# Altium PCB PT-MIS-PCB-007_v1 PCB.PcbDoc
Units mm, origin at the board's own origin, x right, y up, seen from the top; angles counter-clockwise.
Board outline 83 x 100 mm, 2 copper layers (Top Layer, Bottom Layer), stack 1.58 mm thick; 10 components, 5 nets, 37 pads, 42 vias.
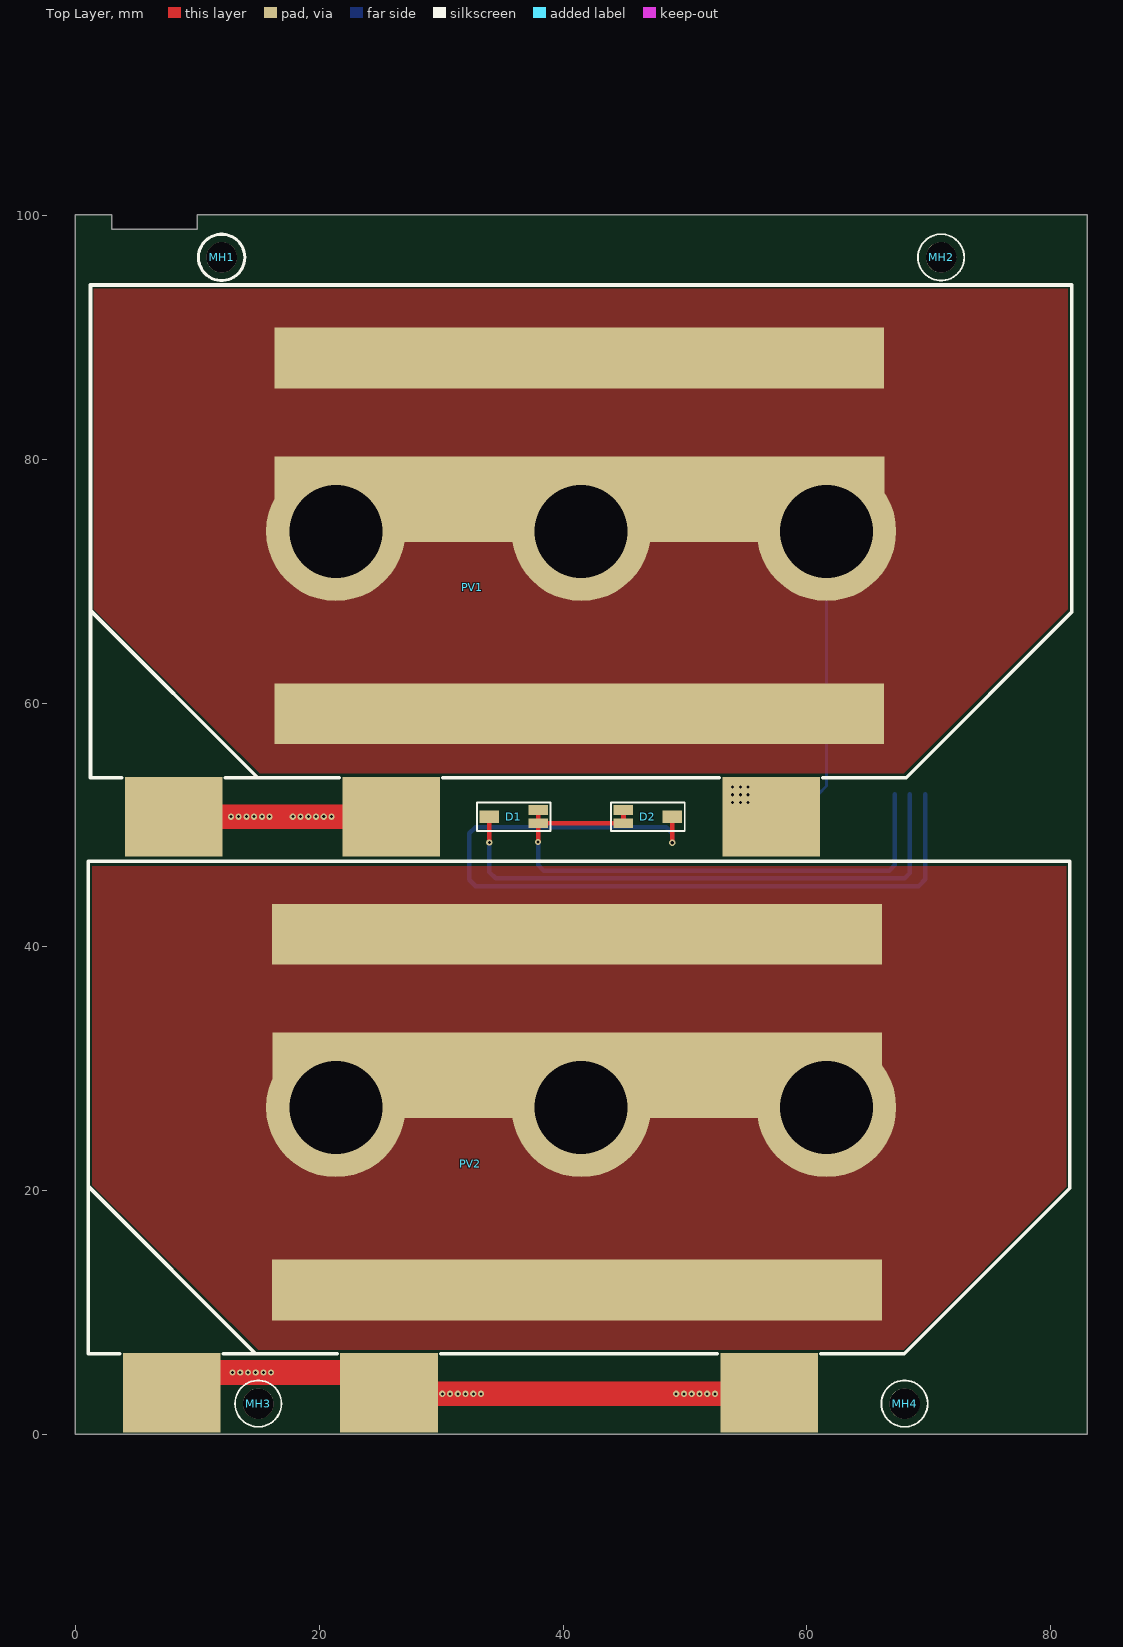
[diagram p0: Top Layer view]
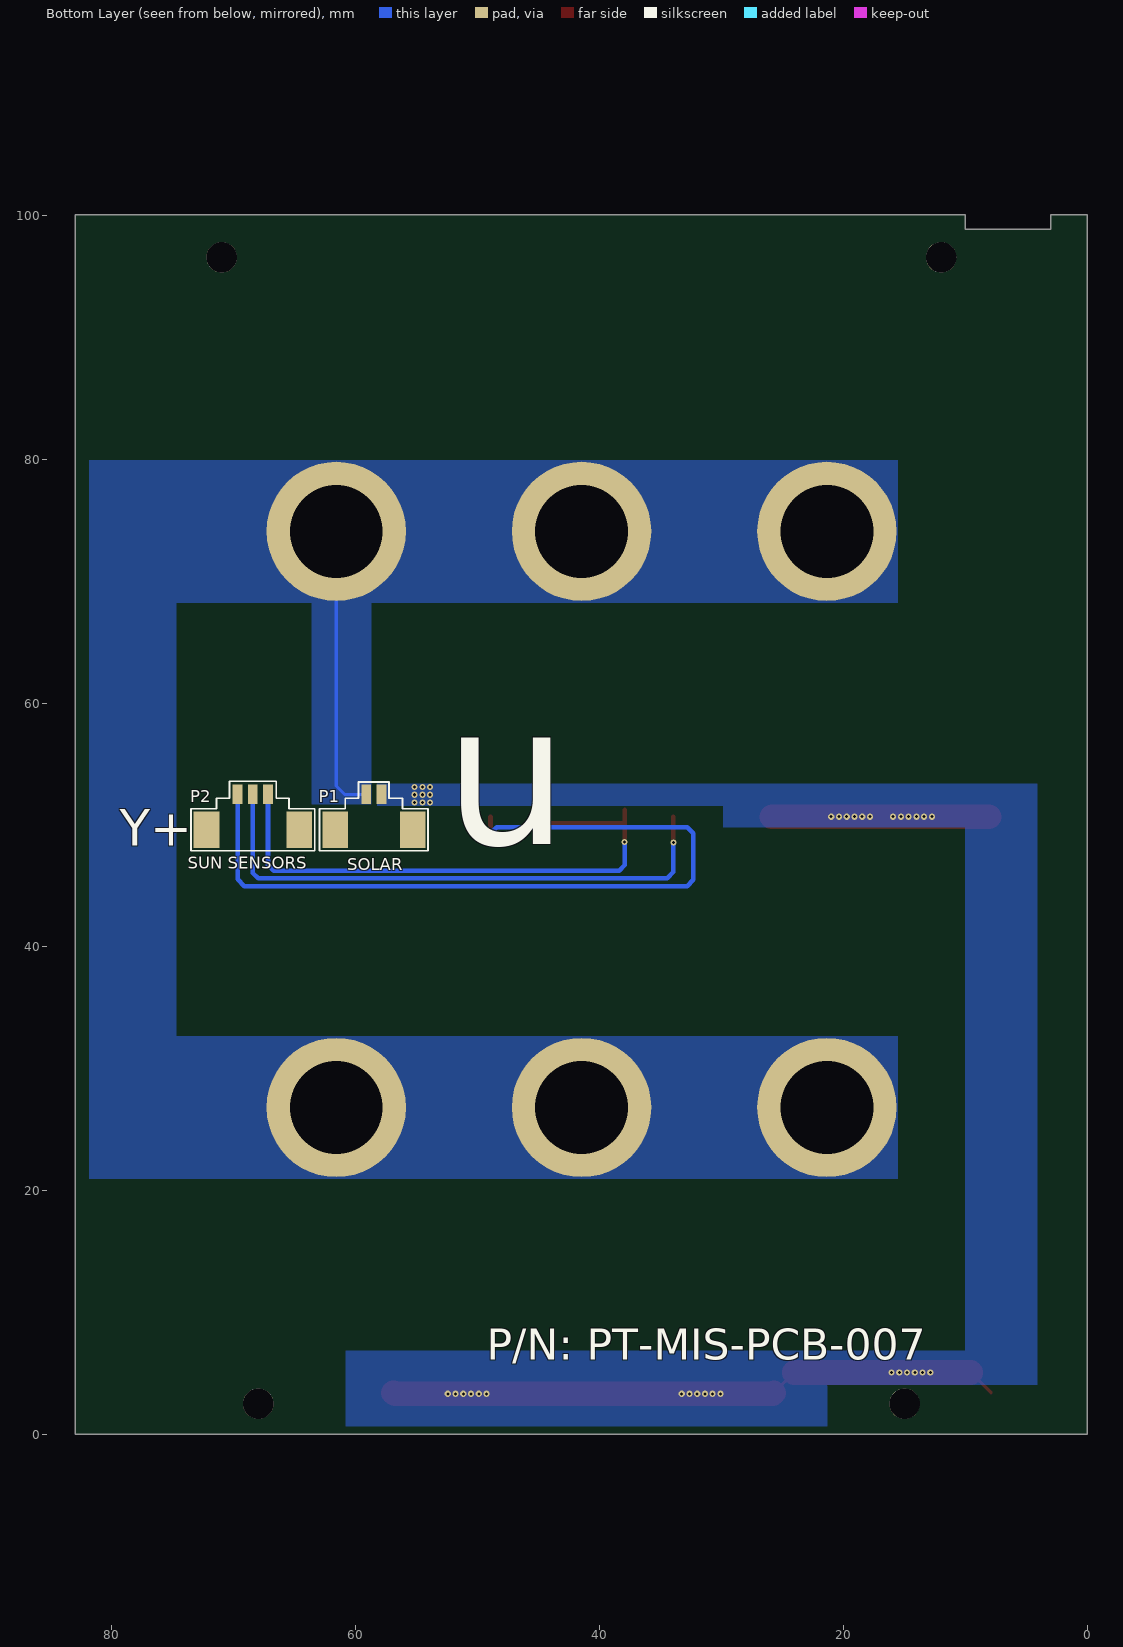
[diagram p1: Bottom Layer view, seen from below]
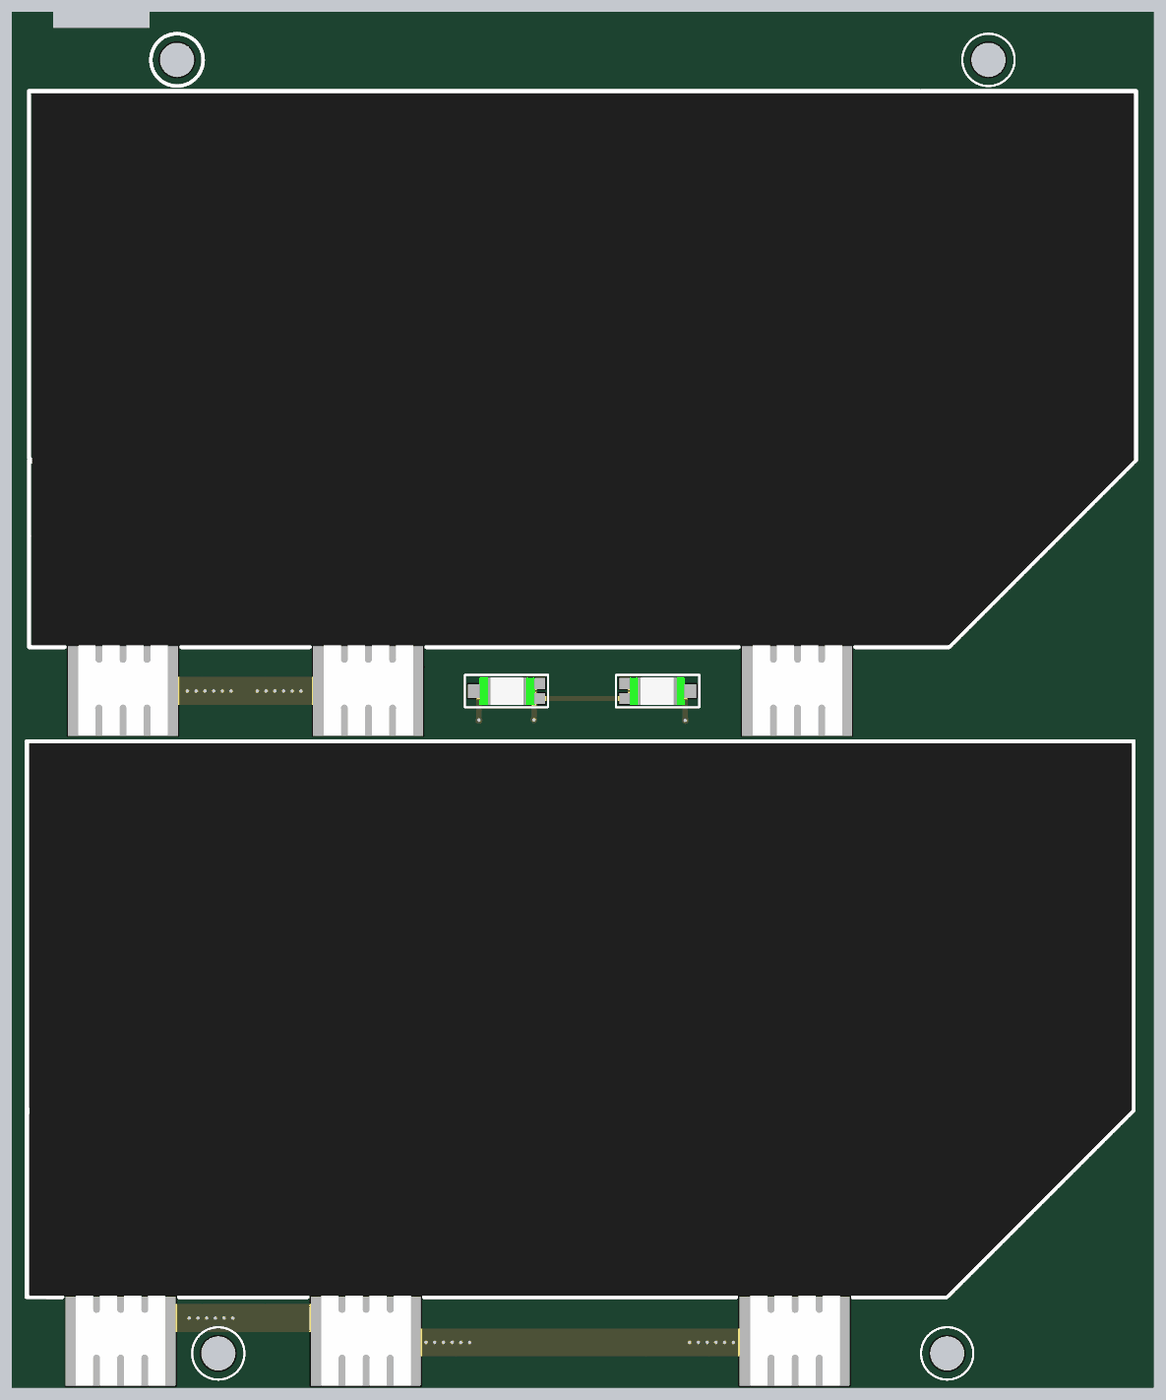
[diagram p2: 3D render of the assembled board from above, using the file's embedded part models]

## Layer stack, top to bottom
Top Solder: solder mask 0.0102, Solder Resist, Dk 3.5
Top Layer: signal copper 0.0356
Dielectric 1: dielectric 1.5086, FR-4, Dk 4.8
Bottom Layer: signal copper 0.0356
Bottom Solder: solder mask 0.0102, Solder Resist, Dk 3.5

## Board outline
0,0.051 0,100.051 3,100.051 3,98.851 10,98.851 10,100.051 83,100.051 83,0.051

## Design rules (kind name [scope] priority, off if disabled: settings)
Clearance [All] p1: gap=0.254 ignorepadtopadclearanceinfootprint=FALSE except(0: Arc-Hole Track-Hole SMDPad-Hole THPad-Hole Via-Hole Fill-Hole Poly-Hole Region-Hole Text-Hole)
PolygonConnect [All] p1: connectstyle=Direct reliefconductorwidth=0.254 reliefentries=4 polygonreliefangle="90 Angle" airgapwidth=0.254
RoutingVias [All] p1: holewidth=0.711 width=1.27 viastyle="Through Hole" minholewidth=0.711 minwidth=1.27 maxholewidth=0.711 maxwidth=1.27
SolderMaskExpansion [All] p1: expansion=0.102
Width [All] p1: maxlimit=2.54 minlimit=0.254 preferedwidth=0.254
30 further rules are at their usual default settings.

## Classes and differential pairs
component class "[03] - SCHEMATIC": D1 D2 MH1 MH2 MH3 MH4 P1 P2 PV1

## Components (designator, comment, footprint, x,y, rotation, side; value= is the part's Value field where it differs from the comment)
D1 "TEMD6010FX01" TEMD6010FX01 35.928,50.686 r180 top
D2 "TEMD6010FX01" TEMD6010FX01 46.977,50.686 r0 top
MH1 "MH_3.8MMNC_2.5MMD" MH_3.8MMNC_2MMD_NON_COPPER_NPTH 12,96.551 r0 top
MH2 "MH_3.8MMNC_2.5MMD" MH_3.8MMNC_2MMD_NON_COPPER_NPTH 71,96.551 r0 top
MH3 "MH_3.8MMNC_2.5MMD" MH_3.8MMNC_2MMD_NON_COPPER_NPTH 15,2.551 r0 top
MH4 "MH_3.8MMNC_2.5MMD" MH_3.8MMNC_2MMD_NON_COPPER_NPTH 68,2.551 r0 top
P1 "0533980271" 0533980271 58.518,51.067 r180 bottom
P2 "0533980371" 0533980371 68.443,51.067 r180 bottom
PV1 "AZUR SPACE 3G30A" "AZUR SPACE 3G30A" 41.343,76.729 r180 top
PV2 "AZUR SPACE 3G30A" "AZUR SPACE 3G30A" 41.171,29.485 r180 top

## Footprints (in the part's own frame and the unit in brackets; to place one, negate y for a bottom-side part, rotate by r counter-clockwise, add the part's x,y. Pads: shape width x height; smd on the part's side, far side on the other; paste and mask are expansions set on the pad)
0533980271 [mm] "CONN HEADER 2POS 1.25MM VERT SMD"
  rect 2.1x3 smd: 0(-3.175,-1.45) 0(3.175,-1.45)
  rect 0.8x1.6 smd: 1(-0.625,1.45) 2(0.625,1.45)
  silkscreen extent -4.45,-3.17 4.45,2.48, body extent -3.82,-2.72 3.83,1.48, height 4.71
0533980371 [mm] "CONN HEADER 3POS 1.25MM VERT SMD"
  rect 2.1x3 smd: 0(-3.8,-1.45) 0(3.8,-1.45)
  rect 0.8x1.6 smd: 1(-1.25,1.45) 2(0,1.45) 3(1.25,1.45)
  silkscreen extent -5.07,-3.18 5.07,2.53, body extent -4.45,-2.67 4.45,1.53, height 4.68
"AZUR SPACE 3G30A" [mm] "30% Triple Junction GaAs Solar Cell Assembly"
  rect 50x7 smd: 1(0,0)
  rect 50x5 smd: 1(0.026,17.602) 1(0.026,-11.557)
  rect 8x6.5 smd: 2(-15.727,26.043) 2(15.448,26.043) 3(33.273,26.043)
  silkscreen extent -40.38,-17.55 40.1,22.85, body extent -40.25,-17.41 39.9,29.27, height 0.31
MH_3.8MMNC_2MMD_NON_COPPER_NPTH [mm] "Mounting Hole 3.8mm Diameter (Non Copper), 2mm Drill NPTH"
  round 2.5 hole 2.5 unplated: 1(0,0)
  silkscreen extent -1.9,-1.9 1.9,1.9
TEMD6010FX01 [mm]
  rect 1.6x0.8 smd: 1(-2.025,-0.55) 1(-2.025,0.55)
  rect 1.6x1 smd: 2(1.975,0)
  silkscreen extent -3.05,-1.17 3,1.18, body extent -2.07,-1 1.93,1, height 1.01

## Part data
D1 D2: "Ambient Light Sensor", Current - Dark (Typ)=2nA, Manufacturer="Vishay Semiconductors", Operating Temperature="-40°C ~ 100°C", Standard Package=3,000, Supplier Part Number 1=751-1051-1-ND, Voltage - DC Reverse (Vr) (Max)=16V, Active Area=0.27mm², Catalog Drawings=TEMx60x0(F)X01, Category="Sensors, Transducers", ComponentLink1Description=https://datasheet.ciiva.com/8280/temd6010-8280593.pdf, ComponentLink1URL=https://datasheet.ciiva.com/8280/temd6010-8280593.pdf, ComponentLink2Description=https://datasheet.ciiva.com/1252/temd6010-1252130.pdf, ComponentLink2URL=https://datasheet.ciiva.com/1252/temd6010-1252130.pdf, ComponentLink3Description=https://datasheet.ciiva.com/2819/temd6010-2819730.pdf, ComponentLink3URL=https://datasheet.ciiva.com/2819/temd6010-2819730.pdf, ComponentLink4Description=https://datasheet.ciiva.com/2819/temd6010-2819731.pdf, ComponentLink4URL=https://datasheet.ciiva.com/2819/temd6010-2819731.pdf, ComponentLink5Description=https://datasheet.ciiva.com/2819/temd6010-2819732.pdf, ComponentLink5URL=https://datasheet.ciiva.com/2819/temd6010-2819732.pdf, ComponentLink6Description=https://datasheet.ciiva.com/4270/temd6010-4270070.pdf, ComponentLink6URL=https://datasheet.ciiva.com/4270/temd6010-4270070.pdf, ComponentLink7Description=https://datasheet.ciiva.com/46430/1794172-46430214.pdf, ComponentLink7URL=https://datasheet.ciiva.com/46430/1794172-46430214.pdf, ComponentLink8Description=https://datasheet.ciiva.com/1249/temd6010-1249179.pdf, ComponentLink8URL=https://datasheet.ciiva.com/1249/temd6010-1249179.pdf, ComponentLink9Description=https://datasheet.ciiva.com/4697/temd6010-102586-4697659.pdf, ComponentLink9URL=https://datasheet.ciiva.com/4697/temd6010-102586-4697659.pdf, Diode Type=PIN, Family="Optical Sensors - Photodiodes", Featured Product="Surface-Mount Ambient Light Sensing Photodiodes", Manufacturer Part Number=TEMD6010FX01, Mounting Type="Surface Mount", Online Catalog="Ambient Light Sensor", Other Names=751-1051-2, Packaging="Tape & Reel (TR)", Pricing 1="1=2.26, 10=1.998, 25=1.4824, 100=1.2892, 250=1.1603, 500=1.0314, 1000=0.8863 (USD)", Product Training Modules="Ambient Light Sensors", Spectral Range="430nm ~ 610nm", Stock 1=29, Supplier 1=Digi-Key, Viewing Angle=120°, Wavelength=540nm
MH1 MH2 MH3 MH4: library part MH_3.8MMNC_2MMD, "Mounting Hole 3.8mm Diameter (Non Copper), 2.5mm Drill NPTH"
P1: "2 Positions Header, Shrouded Connector 0.049\" (1.25mm) Surface Mount, Right Angle Tin", Color=Natural, Manufacturer=Molex, Supplier Part Number 1=WM7606CT-ND, Category="Connectors, Interconnects", ComponentLink1Description=https://datasheet.ciiva.com/6813/533980271-sd-6813860.pdf, ComponentLink1URL=https://datasheet.ciiva.com/6813/533980271-sd-6813860.pdf, ComponentLink2Description=https://datasheet.ciiva.com/3117/0533980271-pcb-headers-3117624.pdf, ComponentLink2URL=https://datasheet.ciiva.com/3117/0533980271-pcb-headers-3117624.pdf, ComponentLink3Description=https://datasheet.ciiva.com/3117/0533980271-pcb-headers-3117625.pdf, ComponentLink3URL=https://datasheet.ciiva.com/3117/0533980271-pcb-headers-3117625.pdf, ComponentLink4Description=https://datasheet.ciiva.com/6813/533980271-sd-6813869.pdf, ComponentLink4URL=https://datasheet.ciiva.com/6813/533980271-sd-6813869.pdf, Connector Type="Header, Shrouded", Contact Finish=Tin, Contact Finish Thickness="39µin (1.00µm)", Contact Mating Length=-, Contact Type="Blade Pin", Family="Rectangular Connectors - Headers, Male Pins", Fastening Type=-, Features="Solder Retention", Manufacturer Part Number=0533980271, Mounting Type="Surface Mount", Number of Positions=2, Number of Positions Loaded=All, Number of Rows=1, Packaging="Cut Tape (CT)", Pitch="0.049\" (1.25mm)", Pricing 1="1=0.88, 10=0.778, 100=0.6713, 500=0.5493 (USD)", Row Spacing=-, Series="PicoBlade™ 53398", Stock 1=25214, Supplier 1=Digi-Key, Termination=Solder
P2: "3 Positions Header, Shrouded Connector 0.049\" (1.25mm) Surface Mount Tin", Color=Natural, Manufacturer=Molex, Supplier Part Number 1=WM7607CT-ND, Category="Connectors, Interconnects", ComponentLink1Description=https://datasheet.ciiva.com/6813/533980271-sd-6813860.pdf, ComponentLink1URL=https://datasheet.ciiva.com/6813/533980271-sd-6813860.pdf, ComponentLink2Description=https://datasheet.ciiva.com/3117/0533980371-pcb-headers-3117626.pdf, ComponentLink2URL=https://datasheet.ciiva.com/3117/0533980371-pcb-headers-3117626.pdf, ComponentLink3Description=https://datasheet.ciiva.com/3117/0533980371-pcb-headers-3117627.pdf, ComponentLink3URL=https://datasheet.ciiva.com/3117/0533980371-pcb-headers-3117627.pdf, Connector Type="Header, Shrouded", Contact Finish=Tin, Contact Finish Thickness="39µin (1.00µm)", Contact Mating Length=-, Contact Type="Blade Pin", Family="Rectangular Connectors - Headers, Male Pins", Fastening Type=-, Features="Solder Retention", Manufacturer Part Number=0533980371, Mounting Type="Surface Mount", Number of Positions=3, Number of Positions Loaded=All, Number of Rows=1, Packaging=Digi-Reel®, Pitch="0.049\" (1.25mm)", Pricing 1="1=1.07, 10=0.942, 100=0.8126, 500=0.6649 (USD)", Row Spacing=-, Series="PicoBlade™ 53398", Stock 1=26974, Supplier 1=Digi-Key, Termination=Solder
PV1 PV2: "30% Triple Junction GaAs Solar Cell Assembly", Current at max. Power="502.9 mA", Voltage at max.Power="2409 mV", Average Efficiency (1353 W/m^2)=29.6, Average Efficiency (1367 W/m^2)=29.3, Average Open Circuit (BOL)="2690 mV", Average Short Circuit (BOL)="519.6 mA"

## Free pads (board coordinates)
  round 11.43 hole 7.62: 2(21.364,74.083) 2(21.365,26.839) 2(41.484,26.839) 2(41.484,74.083) 2(61.603,74.083) 2(61.604,26.839)

## Via types
v1: diameter 0.508, hole 0.254, Top Layer to Bottom Layer, tented both sides, 42 vias

## Nets (pads, with @x,y where several pads share a name; then routed paths per layer and width w, separated by ;. In a path a pad name is that pad's centre, name@x,y a point inside that pad or via, vN(x,y) a via of type N, cw(c..) or ccw(c..) an arc to the next point about the centre after c; other vN are vias at no path point)
2.35V: P1.1 pad.2 PV1.1 PV2.1 | length 23.6
  Bottom Layer w0.254: P1.1 60.921,52.517 61.603,53.199 pad.2@61.603,74.083
GND: P1.2 PV1.2 PV1.3 PV2.2 PV2.3 | length 68.3
  Top Layer w0.254: PV2.3 PV2.3@9.57,5.115 ; PV2.2@24.05,5.115 PV2.2@25.723,3.442
  Top Layer w2.032: PV1.3 v1(12.757,50.686) v1(13.392,50.686) v1(14.027,50.686) v1(14.662,50.686) v1(15.297,50.686) v1(15.932,50.686) v1(17.837,50.686) v1(18.472,50.686) v1(19.107,50.686) v1(19.742,50.686) v1(20.377,50.686) v1(21.012,50.686) PV1.2@25.895,50.686 ; PV2.3@9.57,5.115 v1(12.884,5.115) v1(13.519,5.115) v1(14.154,5.115) v1(14.789,5.115) v1(15.424,5.115) v1(16.059,5.115) PV2.2@24.05,5.115 ; PV2.2@25.723,3.442 25.812,3.353 v1(30.099,3.353) v1(30.734,3.353) v1(31.369,3.353) v1(32.004,3.353) v1(32.639,3.353) v1(33.274,3.353) v1(49.276,3.353) v1(49.911,3.353) v1(50.546,3.353) v1(51.181,3.353) v1(51.816,3.353) v1(52.451,3.353) 56.809,3.353 PV2.2@56.898,3.442
  other v1: 53.905,51.851 54.54,51.851 55.175,51.851 53.905,52.486 54.54,52.486 55.175,52.486 53.905,53.121 54.54,53.121 55.175,53.121
NetD1_1: D1.1 D2.1 P2.3 | length 48
  Top Layer w0.381: v1(37.953,48.599) D1.1@37.953,50.136 ; D1.1@37.953,51.236 D1.1@37.953,50.136 ; D2.1@44.952,51.236 44.952,50.136 D1.1@37.953,50.136
  Bottom Layer w0.381: v1(37.953,48.599) 37.953,46.721 38.411,46.263 66.732,46.263 67.193,46.724 P2.3
NetD1_2: D1.2 P2.2 | length 45.9
  Top Layer w0.381: v1(33.953,48.562) D1.2
  Bottom Layer w0.381: v1(33.953,48.562) 33.953,46.149 34.474,45.628 68.002,45.628 68.443,46.069 P2.2
NetD2_2: D2.2 P2.1 | length 68.6
  Top Layer w0.381: v1(48.952,48.549) D2.2
  Bottom Layer w0.381: v1(48.952,48.549) 48.952,49.311 48.444,49.819 32.823,49.819 32.315,49.311 32.315,45.501 32.823,44.993 69.145,44.993 69.693,45.541 P2.1
pads on no net: MH1.1 MH2.1 MH3.1 MH4.1 P1.0 P2.0

## Polygon pours and split planes (outlines as drawn)
GND on Bottom Layer "Bottom Layer-No Net 1" (solid, pour order 48): 21.336,4.115 21.336,0.686 60.833,0.686 60.833,4.099
GND on Bottom Layer "Bottom Layer-No Net 1" (solid, pour order 36): 4.121,50.073 10,50.072 10,5.877 4.121,5.877
GND on Bottom Layer "Bottom Layer-No Net 1" (solid, remove dead copper, pour order 34): 60.833,6.892 60.833,4.099 4.121,4.099 4.121,6.893
2.35V on Bottom Layer "Bottom Layer-No Net 1" (solid, remove dead copper, pour order 32): 58.731,53.375 58.731,68.234 63.627,68.234 63.627,51.724 58.731,51.724
GND on Bottom Layer "Bottom Layer-No Net 1" (solid, remove dead copper, pour order 30): 58.223,53.375 4.121,53.375 4.121,49.819 21.52,49.819 21.52,51.597 58.223,51.597
GND on Bottom Layer "Bottom Layer-No Net 1" (solid, remove dead copper, pour order 28): 29.845,51.597 29.845,49.819 4.121,49.819 4.121,51.597
2.35V on Bottom Layer "Bottom Layer-No Net 1" (solid, pour order 26): 81.845,32.547 74.733,32.547 74.733,68.488 81.845,68.488
2.35V on Bottom Layer "Bottom Layer-No Net 1" (solid, remove dead copper, pour order 24): 15.551,79.918 15.551,68.234 81.845,68.234 81.845,79.918
2.35V on Bottom Layer "Bottom Layer-No Net 1" (solid, remove dead copper, pour order 18): 15.551,32.674 15.551,20.99 81.845,20.99 81.845,32.674
2.35V on Top Layer "Bottom Layer-No Net 1" (solid, remove dead copper, pour order 50): 1.524,93.98 1.524,67.691 15.113,54.229 67.945,54.229 81.407,67.691 81.407,93.98
2.35V on Top Layer "Bottom Layer-No Net 1" (solid, remove dead copper, pour order 52): 1.397,46.609 1.397,20.446 14.986,6.985 67.945,6.985 81.28,20.32 81.28,46.609

## Silkscreen, mask and mechanical layers (free items; w line width, h text height)
Top Overlay:
  circle w0.254: c12,96.551 r1.9
Bottom Overlay:
  text "Y+" at 79.354,48.298 h3
  text "SUN SENSORS" at 73.787,46.406 h1
  text "SOLAR" at 60.706,46.279 h1
  text "u" at 52.684,44.615 h20
  text "P/N: PT-MIS-PCB-007" at 49.255,6.134 h2.54
Mechanical Drawing:
  circle w0.254: c68,2.551 r1.216
  circle w0.254: c15,2.551 r1.257
  circle w0.254: c12,96.551 r1.239
  circle w0.254: c71,96.551 r1.272
  lines w0.15: 0,0 83,0 83,100 10,100 10,98.8 3,98.8 3,100 0,100 0,0
  text "Mechanical Drawing of PT-MIS-PCB-007_v1" at 13.081,106.172 h1.52
  text "Units: mm" at -16.383,-8.89 h1.52
  text "Scale: 1:1" at -16.383,-11.43 h1.52
Board Outline:
  the board outline again, w0.15
ASM Top:
  text "Assembly TOP of PT-MIS-PCB-007_v1" at 17.78,100.889 h1.52
ASM Bottom:
  text "Assembly BOTTOM of PT-MIS-PCB-003_v1" at 15.494,103.556 h1.52

## Dimensions
15,2.413 to 0,0 on Mechanical Drawing
3,100 to 10,100 on Mechanical Drawing
3,100 to 3,98.8 on Mechanical Drawing
68,2.159 to 15,2.032 on Mechanical Drawing
15,1.294 to 0,0 on Mechanical Drawing
0,0 to 83,0 on Mechanical Drawing
0,0 to 0,100 on Mechanical Drawing